# EAGLE board CT_schematic (EAGLE 7.6.0)

Size 100 x 80 mm. Coordinates in mm from the lower left corner, seen from the top.
Outline: 0,0 100,0 100,80 0,80 0,0
Copper layers (1*16): Top 0.035mm / dielectric 1.5mm / Bottom 0.035mm
Design rules "default": minimum track width 10mil, minimum drill 24mil, track to track 8mil, track to pad 8mil, pad to pad 8mil, via to via 8mil, smd to smd 8mil, copper to edge 40mil, drill to drill 8mil, minimum pad ring 10mil, minimum via ring 8mil, stop-mask expansion 4mil, vias tented up to drill 0mil, thermal gap 10mil

## Footprints (pad centres in the part's own frame; a part is rotated, then mirrored left to right if it is on the bottom)
C0603 = smd 0.8 x 0.8: 1 -0.762,0; 2 0.762,0
C0402 = smd 0.5 x 0.5: 1 -0.508,0; 2 0.508,0
EXV-9B = smd 2.718 x 1.778: 1 -2.108,0; 2 2.108,0
C0805 = smd 1.2 x 1.3: 1 -1.016,0; 2 1.016,0
EXV-9H = smd 3.505 x 1.676: 1 -2.857,0; 2 2.857,0
L0603 = smd 0.8 x 0.8: 1 -0.762,0; 2 0.762,0
L0806 = smd 1.016 x 1.524: 1 -0.889,0; 2 0.889,0
PJ-037B_PACKAGE = drill 3.7 square: 1 12,0 | drill 3.2 square: 2 6,0
R0603 = smd 0.8 x 0.8: 1 -0.762,0; 2 0.762,0
LQFP64 = smd 0.3 x 1.2: 1 -3.75,-5.75; 2 -3.25,-5.75; 3 -2.75,-5.75; 4 -2.25,-5.75; 5 -1.75,-5.75; 6 -1.25,-5.75; 7 -0.75,-5.75; 8 -0.25,-5.75; 9 0.25,-5.75; 10 0.75,-5.75; 11 1.25,-5.75; 12 1.75,-5.75; 13 2.25,-5.75; 14 2.75,-5.75; 15 3.25,-5.75; 16 3.75,-5.75; 33 3.75,5.75; 34 3.25,5.75; 35 2.75,5.75; 36 2.25,5.75; 37 1.75,5.75; 38 1.25,5.75; 39 0.75,5.75; 40 0.25,5.75; 41 -0.25,5.75; 42 -0.75,5.75; 43 -1.25,5.75; 44 -1.75,5.75; 45 -2.25,5.75; 46 -2.75,5.75; 47 -3.25,5.75; 48 -3.75,5.75 | smd 1.2 x 0.3: 17 5.75,-3.75; 18 5.75,-3.25; 19 5.75,-2.75; 20 5.75,-2.25; 21 5.75,-1.75; 22 5.75,-1.25; 23 5.75,-0.75; 24 5.75,-0.25; 25 5.75,0.25; 26 5.75,0.75; 27 5.75,1.25; 28 5.75,1.75; 29 5.75,2.25; 30 5.75,2.75; 31 5.75,3.25; 32 5.75,3.75; 49 -5.75,3.75; 50 -5.75,3.25; 51 -5.75,2.75; 52 -5.75,2.25; 53 -5.75,1.75; 54 -5.75,1.25; 55 -5.75,0.75; 56 -5.75,0.25; 57 -5.75,-0.25; 58 -5.75,-0.75; 59 -5.75,-1.25; 60 -5.75,-1.75; 61 -5.75,-2.25; 62 -5.75,-2.75; 63 -5.75,-3.25; 64 -5.75,-3.75
SOT-23-6 = smd 1.1 x 0.6: 1 -1.4,0.95; 2 -1.4,0; 3 -1.4,-0.95; 4 1.4,-0.95; 5 1.4,0; 6 1.4,0.95
USB-A-H = drill 0.914: 1 2.718,3.493; 2 2.718,1.003; 3 2.718,-1.003; 4 2.718,-3.493 | drill 2.311: 5 0,-6.566; 6 0,6.566
SOT143B = smd 1 x 0.7: 1 -0.75,-1 | smd 0.6 x 0.7: 2 0.95,-1; 3 0.95,1; 4 -0.95,1
ABS07-32.768KHZ-7-T = smd 1.1 x 2.4: 1 -2.5,0; 2 0,0
ASFL1 = smd 1.7 x 1.5: 1 -1.27,-1.1; 2 1.27,-1.1; 3 1.27,1.1; 4 -1.27,1.1
LP2954 = smd 1.6 x 0.6: 1 -2.475,1.905 | smd 1.55 x 0.6: 2 -2.475,0.635; 3 -2.475,-0.635; 4 -2.475,-1.905; 5 2.475,-1.905; 6 2.475,-0.635; 7 2.475,0.635; 8 2.475,1.905
MSOP-8 = smd 1.499 x 0.432: 1 -2.184,0.965; 2 -2.184,0.33; 3 -2.184,-0.33; 4 -2.184,-0.965; 5 2.184,-0.965; 6 2.184,-0.33; 7 2.184,0.33; 8 2.184,0.965
SON-6 = smd 0.55 x 0.3: 1 -0.355,0.5 | smd 0.52 x 0.3: 2 -0.37,0; 3 -0.37,-0.5; 4 0.37,-0.5; 5 0.37,0; 6 0.37,0.5
SW_4-1437565-2 = smd 1.4 x 2.1: 1 -2.23,4.55; 2 -2.23,-4.55; 3 2.23,4.55; 4 2.23,-4.55
LGM67K-G1J2-24-Z = smd 0.8 x 1.4: A -2,0; C 0,0
NC7SZ125M5X = smd 1.3 x 0.7: 1 -1.3,0.95; 2 -1.3,0; 3 -1.3,-0.95; 4 1.3,-0.95; 5 1.3,0.95
DUMMY_PACKAGE_133 = drill 0.3: 1 0,-1; 2 1.5,-1; 3 3,-1

## Placement (x,y rotation side)
C1  1e-06  [C0603]  -59.69,64.77 0 top  (outside the outline)
C2  1e-07  [C0603]  -63.5,64.77 0 top  (outside the outline)
C3  1e-07  [C0603]  -67.31,64.77 0 top  (outside the outline)
C4  1e-07  [C0603]  -15.24,69.85 0 top  (outside the outline)
C5  1e-07  [C0603]  -19.05,69.85 0 top  (outside the outline)
C6  1e-07  [C0603]  -22.86,69.85 0 top  (outside the outline)
C7  4.7e-06  [C0603]  -44.45,64.77 0 top  (outside the outline)
C8  2.2e-06  [C0603]  -48.26,64.77 0 top  (outside the outline)
C9  2.2e-06  [C0603]  -52.07,64.77 0 top  (outside the outline)
C10  1e-08  [C0603]  -26.67,69.85 0 top  (outside the outline)
C11  1e-06  [C0603]  -30.48,69.85 0 top  (outside the outline)
C12  1e-11  [C0402]  -60.96,69.85 0 top  (outside the outline)
C13  1e-11  [C0402]  -64.77,69.85 0 top  (outside the outline)
C14  1e-08  [C0402]  -68.58,69.85 0 top  (outside the outline)
C15  1e-06  [EXV-9B]  -22.86,53.34 0 top  (outside the outline)
C16  2.2e-06  [EXV-9B]  -31.75,53.34 0 top  (outside the outline)
C17  1e-06  [C0603]  -34.29,69.85 0 top  (outside the outline)
C18  1e-05  [C0805]  -55.88,53.34 0 top  (outside the outline)
C19  1e-05  [C0805]  -60.96,53.34 0 top  (outside the outline)
C20  1.6e-09  [C0603]  -55.88,64.77 0 top  (outside the outline)
C21  1e-07  [C0402]  -15.24,74.93 0 top  (outside the outline)
C22  0.0001  [EXV-9H]  -17.78,46.99 0 top  (outside the outline)
C23  0.0001  [EXV-9H]  -29.21,46.99 0 top  (outside the outline)
C24  1e-08  [C0402]  -19.05,74.93 0 top  (outside the outline)
F1  240.0  [L0603]  -38.1,69.85 0 top  (outside the outline)
I1  3.3e-06  [L0806]  -16.51,53.34 0 top  (outside the outline)
J1  PJ-037B  [PJ-037B_PACKAGE]  -62.23,7.62 0 top  (outside the outline)
R2  1000.0  [R0603]  -41.91,69.85 0 top  (outside the outline)
R4  4700.0  [R0603]  -45.72,69.85 0 top  (outside the outline)
R5  47000.0  [R0603]  -40.64,59.69 0 top  (outside the outline)
R6  47000.0  [R0603]  -45.72,59.69 0 top  (outside the outline)
R7  10000.0  [R0603]  -50.8,59.69 0 top  (outside the outline)
R8  1270.0  [R0603]  -49.53,69.85 0 top  (outside the outline)
R9  10000.0  [R0603]  -55.88,59.69 0 top  (outside the outline)
R10  10000.0  [R0603]  -60.96,59.69 0 top  (outside the outline)
R11  1270.0  [R0603]  -53.34,69.85 0 top  (outside the outline)
R12  10000.0  [R0603]  -66.04,59.69 0 top  (outside the outline)
R13  10000.0  [R0603]  -15.24,64.77 0 top  (outside the outline)
R14  100000.0  [R0603]  -15.24,59.69 0 top  (outside the outline)
R15  100000.0  [R0603]  -20.32,59.69 0 top  (outside the outline)
R16  164658.62  [R0603]  -66.04,53.34 0 top  (outside the outline)
R17  100000.0  [R0603]  -25.4,59.69 0 top  (outside the outline)
R18  47000.0  [R0603]  -20.32,64.77 0 top  (outside the outline)
R19  56000.0  [R0603]  -25.4,64.77 0 top  (outside the outline)
R20  18000.0  [R0603]  -30.48,64.77 0 top  (outside the outline)
R21  10000.0  [R0603]  -35.56,64.77 0 top  (outside the outline)
R22  10000.0  [R0603]  -40.64,64.77 0 top  (outside the outline)
R23  9100.0  [R0603]  -57.15,69.85 0 top  (outside the outline)
R24  680000.0  [R0603]  -30.48,59.69 0 top  (outside the outline)
R25  120000.0  [R0603]  -35.56,59.69 0 top  (outside the outline)
U1  STM32F205RGT6  [LQFP64]  -24.13,24.13 0 top  (outside the outline)
U2  MAX4995AAUT+T  [SOT-23-6]  -39.37,53.34 0 top  (outside the outline)
U3  MAX4995AAUT+T  [SOT-23-6]  -44.45,53.34 0 top  (outside the outline)
U4  61400416021  [USB-A-H]  -19.05,8.89 0 top  (outside the outline)
U5  prtr5v0u2ax  [SOT143B]  -31.75,74.93 0 top  (outside the outline)
U6  61400416021  [USB-A-H]  -36.83,8.89 0 top  (outside the outline)
U7  prtr5v0u2ax  [SOT143B]  -44.45,74.93 0 top  (outside the outline)
U8  ABS07-32.768KHZ-7-T  [ABS07-32.768KHZ-7-T]  -50.8,46.99 0 top  (outside the outline)
U9  ASFL1-25MHZ-NCS  [ASFL1]  -66.04,35.56 0 top  (outside the outline)
U10  LP2954AIMX/NOPB  [LP2954]  -48.26,35.56 0 top  (outside the outline)
U11  TPS61085DGKR  [MSOP-8]  -31.75,36.83 0 top  (outside the outline)
U12  TPS3895ADRYR  [SON-6]  -53.34,73.66 0 top  (outside the outline)
U13  4-1437565-2  [SW_4-1437565-2]  -45.72,24.13 0 top  (outside the outline)
U14  Q65110A2395  [LGM67K-G1J2-24-Z]  -59.69,46.99 0 top  (outside the outline)
U15  nc7sz125m5x  [NC7SZ125M5X]  -49.53,53.34 0 top  (outside the outline)
U16  Dummy  [DUMMY_PACKAGE_133]  -50.8,74.93 0 top  (outside the outline)

## Library data of the parts
C1-C24 F1 I1 J1 R2 R4-R25 U1-U16 = circuit_tree

## Nets
CLK_CRYSTAL_U1_3: C12.1 U1.3 U8.1
CLK_CRYSTAL_U1_4: C13.1 U1.4 U8.2
CLK_U1_5: U1.5 U9.3
GND: C1.2 C2.2 C3.2 C4.2 C5.2 C6.2 C7.2 C8.2 C9.2 C10.2 C11.2 C12.2 C13.2 C14.2 C15.2 C16.2 C17.2 C18.2 C19.1 C19.2 C20.1 C20.2 C21.2 C22.2 C23.2 C24.2 J1.2 R2.2 R5.2 R6.2 R7.2 R8.2 R10.2 R11.2 R13.2 R17.2 R20.2 R23.2 R25.2 U1.12 U1.18 U1.63 U2.2 U3.2 U4.4 U4.5 U4.6 U5.1 U6.4 U6.5 U6.6 U7.1 U9.2 U10.4 U11.4 U12.2 U14.C U15.1 U15.3 U16.1
NET_U1_7: R4.1 U1.7 U15.4
NET_U1_13: C10.1 C11.1 F1.1 U1.13
NET_U1_31: C8.1 U1.31
NET_U1_33: R11.1 U1.33
NET_U1_43: R8.1 U1.43
NET_U1_47: C9.1 U1.47
NET_U1_60: R7.1 U1.60
NET_U1_61: U14.A
NET_U1_62: U13.3 U13.4
NET_U2_3: R5.1 U2.3
NET_U3_3: R6.1 U3.3
NET_U10_3: R15.1 U10.3
NET_U10_5: R14.1 U10.5
NET_U10_7: R16.2 R17.1 U10.7
NET_U11_1: R18.1 U11.1
NET_U11_2: R19.1 R20.1 U11.2
NET_U11_3: U11.3
NET_U11_5: I1.1 U11.5
NET_U11_7: U11.7
NET_U11_ATNET_3: R19.2
NET_U11_ATNET_4: R18.2
NET_U12_1: R22.1 R23.1 U12.1
NET_U12_3: R24.2 R25.1 U12.3
NET_U12_4: R21.1 U12.4 U15.2
NET_U13_1: R2.1 U13.1 U13.2
PROC_ADC1_IN1: U1.15 U16.3
PROC_ADC1_IN2: U1.16 U16.2
PROC_GPIO_TO_U1_USB_FAULT: R9.1 U1.6 U2.6
PROC_GPIO_TO_U1_USB_FAULT2: R12.1 U1.9 U3.6
PROC_GPIO_TO_U1_VBUS_EN: R10.1 U1.2 U2.4
PROC_GPIO_TO_U1_VBUS_EN2: R13.1 U1.8 U3.4
PROC_USB_OTG_FS_DM: U1.44 U4.2 U5.3
PROC_USB_OTG_FS_DP: U1.45 U4.3 U5.2
PROC_USB_OTG_FS_VBUS: U1.42 U2.1 U4.1 U5.4
PROC_USB_OTG_HS_DM: U1.35 U6.2 U7.3
PROC_USB_OTG_HS_DP: U1.36 U6.3 U7.2
PROC_USB_OTG_HS_VBUS: U1.34 U3.1 U6.1 U7.4
VCC_S1_4V7: C15.1 C17.1 C18.1 C22.1 C23.1 I1.2 J1.1 R15.2 U10.8 U11.3 U11.6
VCC_TIER1_3V3: C1.1 C2.1 C3.1 C4.1 C5.1 C6.1 C7.1 C14.1 C16.1 C21.1 C24.1 F1.2 R4.2 R9.2 R12.2 R14.2 R16.1 R21.2 R22.2 R24.1 U1.1 U1.19 U1.32 U1.48 U1.64 U9.4 U10.1 U12.6 U15.5
VCC_TIER1_5V0: C19.2 R19.2 U2.5 U3.5

## Tracks (layer width: path | path; a pad name or v marks a point on that pad's centre or on a via)
CLK_CRYSTAL_U1_3  (2 unrouted)
CLK_CRYSTAL_U1_4  (2 unrouted)
CLK_U1_5  (1 unrouted)
GND  (59 unrouted)
NET_U1_7  (2 unrouted)
NET_U1_13  (3 unrouted)
NET_U1_31  (1 unrouted)
NET_U1_33  (1 unrouted)
NET_U1_43  (1 unrouted)
NET_U1_47  (1 unrouted)
NET_U1_60  (1 unrouted)
NET_U1_62  (1 unrouted)
NET_U2_3  (1 unrouted)
NET_U3_3  (1 unrouted)
NET_U10_3  (1 unrouted)
NET_U10_5  (1 unrouted)
NET_U10_7  (2 unrouted)
NET_U11_1  (1 unrouted)
NET_U11_2  (2 unrouted)
NET_U11_5  (1 unrouted)
NET_U12_1  (2 unrouted)
NET_U12_3  (2 unrouted)
NET_U12_4  (2 unrouted)
NET_U13_1  (2 unrouted)
PROC_ADC1_IN1  (1 unrouted)
PROC_ADC1_IN2  (1 unrouted)
PROC_GPIO_TO_U1_USB_FAULT  (2 unrouted)
PROC_GPIO_TO_U1_USB_FAULT2  (2 unrouted)
PROC_GPIO_TO_U1_VBUS_EN  (2 unrouted)
PROC_GPIO_TO_U1_VBUS_EN2  (2 unrouted)
PROC_USB_OTG_FS_DM  (2 unrouted)
PROC_USB_OTG_FS_DP  (2 unrouted)
PROC_USB_OTG_FS_VBUS  (3 unrouted)
PROC_USB_OTG_HS_DM  (2 unrouted)
PROC_USB_OTG_HS_DP  (2 unrouted)
PROC_USB_OTG_HS_VBUS  (3 unrouted)
VCC_S1_4V7  (10 unrouted)
VCC_TIER1_3V3  (28 unrouted)
VCC_TIER1_5V0  (3 unrouted)